# Altium PCB PCB2.PcbDoc
Units mil, origin at the board's own origin, x right, y up, seen from the top; angles counter-clockwise.
Board outline 5417.32 x 870.08 mil, 2 copper layers (Top Layer, Bottom Layer); 41 components, 29 nets, 145 pads, 30 vias.
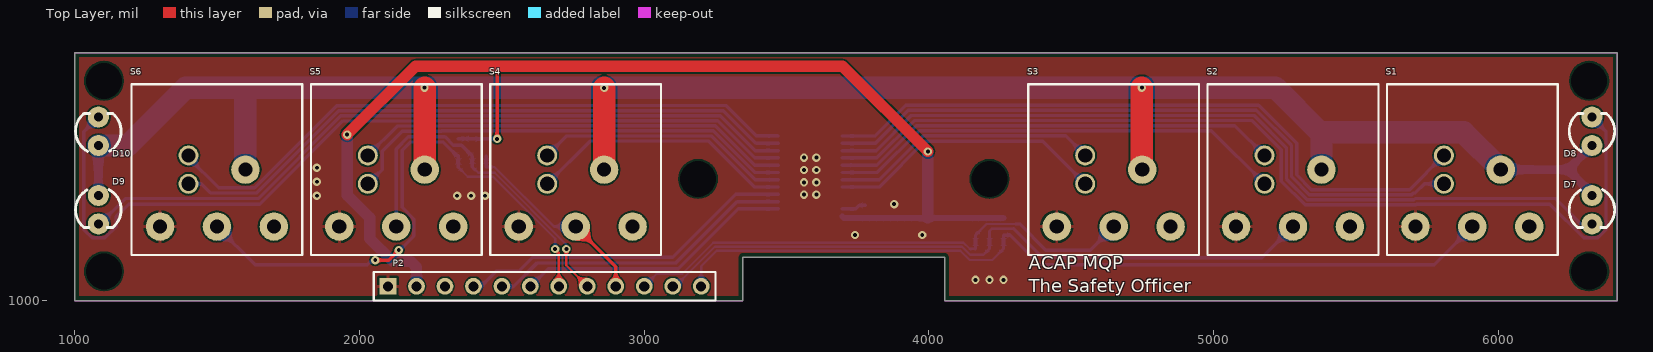
[diagram p0: Top Layer view]
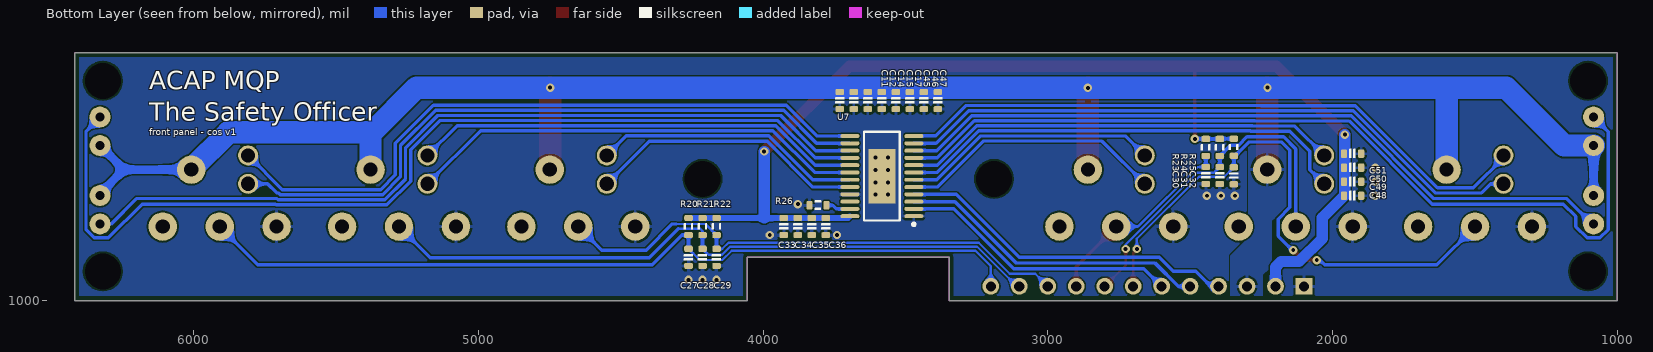
[diagram p1: Bottom Layer view, seen from below]
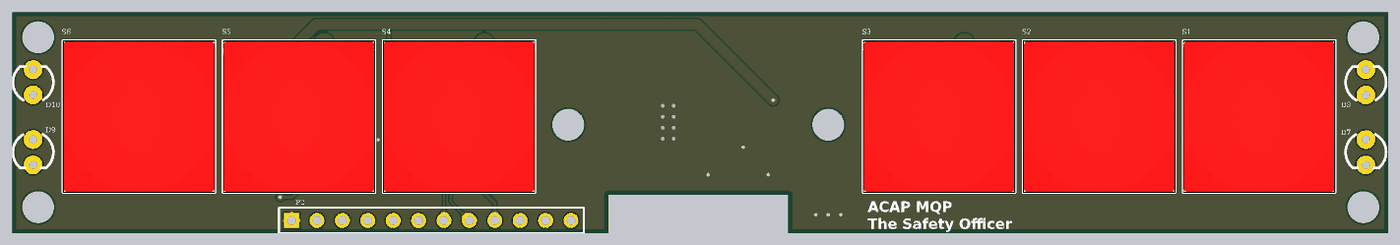
[diagram p2: 3D render of the assembled board from above, using the file's embedded part models]
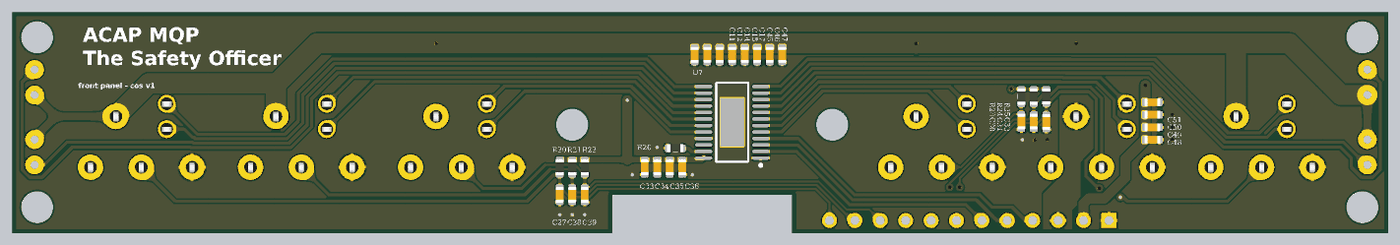
[diagram p3: 3D render of the assembled board from below, using the file's embedded part models]

## Layer stack, top to bottom
Top Solder: solder mask 0.4, Solder Resist, Dk 3.5
Top Layer: signal copper 1.4
Dielectric 1: dielectric 12.6, FR-4, Dk 4.8
Bottom Layer: signal copper 1.4
Bottom Solder: solder mask 0.4, Solder Resist, Dk 3.5

## Board outline
1000,1000 1000,1870.08 6417.32,1870.08 6417.32,1000 4055.12,1000 4055.12,1151.57 3346.46,1151.57 3346.46,1000

## Design rules (kind name [scope] priority, off if disabled: settings)
BoardOutlineClearance [InNetClass('All Nets')] p1: gap=15 ignorepadtopadclearanceinfootprint=FALSE
Clearance BoardEdge [All vs OnLayer('Keep-Out Layer')] p1: gap=15.75 ignorepadtopadclearanceinfootprint=FALSE
Clearance "Stitching GND" [IsStitchingVia and InNet('GND') vs (IsVia and (Not IsStitchingVia)) Or IsPad] p2 off: gap=5 ignorepadtopadclearanceinfootprint=FALSE except(0: Arc-Hole Track-Hole SMDPad-Hole THPad-Hole Via-Hole Fill-Hole Poly-Hole Region-Hole Text-Hole)
Clearance Clearance_outlinepolygon [inPolygon vs OnLayer('Keep-Out Layer')] p3 off: gap=15.75 ignorepadtopadclearanceinfootprint=FALSE except(0: Arc-Hole Track-Hole SMDPad-Hole THPad-Hole Via-Hole Fill-Hole Poly-Hole Region-Hole Text-Hole)
Clearance Clearance-polygonpolygon [InPolygon vs InPolygon] p4 off: gap=19.68 ignorepadtopadclearanceinfootprint=FALSE except(0: Arc-Hole Track-Hole SMDPad-Hole THPad-Hole Via-Hole Fill-Hole Poly-Hole Region-Hole Text-Hole)
Clearance Clearance_2 [All] p5: gap=6 ignorepadtopadclearanceinfootprint=FALSE except(0: Arc-Hole Track-Hole SMDPad-Hole THPad-Hole Via-Hole Fill-Hole Poly-Hole Region-Hole Text-Hole)
ComponentClearance [InComponentClass('no-clearance-check')] p1: gap=-39330.71 collisioncheckmode=3 verticalgap=-39330.71 showdistances=FALSE
ComponentClearance ComponentClearance_4 [All] p2: gap=10 collisioncheckmode=3 verticalgap=10 showdistances=FALSE
HoleSize [All] p1: absolutevalues=TRUE maxlimit=236.22 minlimit=13 maxpercent=80.000 minpercent=20.000
MinimumAnnularRing ignore [(HasFootprint('LMZ21701SIL') OR HasFootprint('m3 hole') OR HasFootprint('G3T-12AH'))] p1: minimumring=0
MinimumAnnularRing [All] p2: minimumring=7
MinimumSolderMaskSliver [All] p1: minsoldermaskwidth=2.99
NetAntennae [All] p1: netantennaetolerance=78.74
PolygonConnect PolygonConnect_heat [IsVia OR InPolygonClass('nothermalrelief') OR InPadClass('heatsink')] p1: connectstyle=Direct reliefconductorwidth=10 reliefentries=4 polygonreliefangle="90 Angle" airgapwidth=10
PolygonConnect [All] p2: connectstyle=Relief reliefconductorwidth=11.81 reliefentries=4 polygonreliefangle="90 Angle" airgapwidth=7.87
RoutingVias [All] p1: holewidth=28 width=50 viastyle="Through Hole" minholewidth=28 minwidth=50 maxholewidth=28 maxwidth=50 useviatemplates=TRUE viatemplateguid#1={89855FE1-761D-415D-8D08-2E9EAEC3F10C} viatemplatename#1=signal
SilkToSilkClearance [All] p1 off: silktosilkclearance=0
SilkToSolderMaskClearance SilkToSolderMaskClearance_1 [HasFootprint('PAD-JUMPER-2-NO_YES_SILK')] p1: minsilkscreentomaskgap=0 clearancetoexposedcopper=TRUE
SilkToSolderMaskClearance [IsPad] p2: minsilkscreentomaskgap=5.91 clearancetoexposedcopper=TRUE
SolderMaskExpansion [All] p1: expansion=3
Width [All] p1: maxlimit=999 minlimit=6 preferedwidth=11.81
24 further rules are at their usual default settings.

## Classes and differential pairs
pad class heatsink: U7-25
net class BUTTON[1..6]: BUTTON1 BUTTON2 BUTTON3 BUTTON4 BUTTON5 BUTTON6
component class frontpanel_interconnect: P2

## Components (designator, comment, footprint, x,y, rotation, side; value= is the part's Value field where it differs from the comment)
C11 "Cap_0603" CAP_0603 3730.49,1702.41 r90 bottom value=100nf
C12 "Cap_0603" CAP_0603 3681.26,1702.41 r90 bottom value=100nf
C14 "Cap_0603" CAP_0603 3632.05,1702.41 r90 bottom value=100nf
C15 "Cap_0603" CAP_0603 3582.83,1702.41 r90 bottom value=100nf
C17 "Cap_0603" CAP_0603 3533.62,1702.41 r90 bottom value=100nf
C27 "Cap_0603" CAP_0603 4261.81,1151.57 r90 bottom value=104
C28 "Cap_0603" CAP_0603 4212.6,1151.57 r90 bottom value=104
C29 "Cap_0603" CAP_0603 4163.39,1151.57 r90 bottom value=104
C30 "Cap_0603" CAP_0603 2444.88,1439.45 r90 bottom value=104
C31 "Cap_0603" CAP_0603 2395.67,1439.45 r90 bottom value=104
C32 "Cap_0603" CAP_0603 2346.46,1438.35 r90 bottom value=104
C33 "Cap_0603" CAP_0603 3927.17,1259.84 r90 bottom value=100nf
C34 "Cap_0603" CAP_0603 3877.95,1259.84 r90 bottom value=100nf
C35 "Cap_0603" CAP_0603 3828.74,1259.84 r90 bottom value=100nf
C36 "Cap_0603" CAP_0603 3779.53,1259.84 r90 bottom value=100nf
C45 "Cap_0603" CAP_0603 3484.41,1702.41 r90 bottom value=100nf
C46 "Cap_0603" CAP_0603 3435.2,1702.41 r90 bottom value=100nf
C47 "Cap_0603" CAP_0603 3385.98,1702.41 r90 bottom value=100nf
C48 "Cap_0603" CAP_0603 1929.13,1368.11 r0 bottom value=100nf
C49 "Cap_0603" CAP_0603 1929.13,1417.32 r0 bottom value=100nf
C50 "Cap_0603" CAP_0603 1929.13,1466.54 r0 bottom value=100nf
C51 "Cap_0603" CAP_0603 1929.13,1515.75 r0 bottom value=100nf
D7 "" LED3MM 6328.74,1318.9 r270 top
D8 "" LED3MM 6328.74,1594.49 r90 top
D9 "" LED3MM 1082.68,1318.9 r270 top
D10 "" LED3MM 1082.68,1594.49 r90 top
P2 "Header 12" HDR1X12 2100,1050 r0 top
R20 "Res_0603" RES_0603 4261.81,1259.84 r90 bottom value=20k
R21 "Res_0603" RES_0603 4212.6,1259.84 r90 bottom value=20k
R22 "Res_0603" RES_0603 4163.39,1259.84 r90 bottom value=20k
R23 "Res_0603" RES_0603 2444.88,1537.87 r90 bottom value=20k
R24 "Res_0603" RES_0603 2395.67,1537.87 r90 bottom value=20k
R25 "Res_0603" RES_0603 2346.46,1538.35 r90 bottom value=20k
R26 "Res_0603" RES_0603 3807.09,1334.65 r0 bottom value=750+
S1 "UB2 Switch" "EXTRON CLICKY" 5908.66,1459.84 r270 top
S2 "UB2 Switch" "EXTRON CLICKY" 5278.74,1459.84 r270 top
S3 "UB2 Switch" "EXTRON CLICKY" 4648.82,1459.84 r270 top
S4 "UB2 Switch" "EXTRON CLICKY" 2759.06,1459.84 r270 top
S5 "UB2 Switch" "EXTRON CLICKY" 2129.13,1459.84 r270 top
S6 "UB2 Switch" "EXTRON CLICKY" 1499.21,1459.84 r270 top
U7 "TLC5926QPWPRQ1" TI-PWP24-4420X1950TP_N 3582.68,1437.01 r0 bottom

## Footprints (in the part's own frame and the unit in brackets; to place one, negate y for a bottom-side part, rotate by r counter-clockwise, add the part's x,y. Pads: shape width x height; smd on the part's side, far side on the other; paste and mask are expansions set on the pad)
CAP_0603 [mil]
  rrect50% 22x30 smd: 1(-30,0) 2(30,0)
  silkscreen extent -10,-15 10,15, body extent -31,-16 31,16, height 31
"EXTRON CLICKY" [mil]
  round 100 hole 50: 1(200,-200) 2(200,0) 3(200,200) 4(0,100)
  round 70 hole 50: 5(-50,-100) 6(50,-100)
  silkscreen extent -300,-300 300,300, body extent -299,-300 301,300, height 732
HDR1X12 [mm] "Connector; Header; 12 Position"
  rect 1.5x1.5 hole 0.9: 1(0,0)
  round 1.5 hole 0.9: 2(2.54,0) 3(5.08,0) 4(7.62,0) 5(10.16,0) 6(12.7,0) 7(15.24,0) 8(17.78,0) 9(20.32,0) 10(22.86,0) 11(25.4,0) 12(27.94,0)
  silkscreen extent -1.27,-1.27 29.21,1.27
LED3MM [mil]
  round 74 hole 32: A(-50,0) K(50,0)
  silkscreen extent -71,-80 62,80
RES_0603 [mil]
  rrect50% 22x30 smd: 1(-30,0) 2(30,0)
  silkscreen extent -10,-16 10,16, body extent -31,-16 31,16, height 18
TI-PWP24-4420X1950TP_N [mm] "SOP, 24-Leads, Body 7.8x4.4mm, Pitch 0.65mm, Thermal Pad 4.42x1.95mm, IPC Medium Density"
  oval 1.7x0.35 smd: 1(-2.85,3.575) 2(-2.85,2.925) 3(-2.85,2.275) 4(-2.85,1.625) 5(-2.85,0.975) 6(-2.85,0.325) 7(-2.85,-0.325) 8(-2.85,-0.975) 9(-2.85,-1.625) 10(-2.85,-2.275) 11(-2.85,-2.925) 12(-2.85,-3.575) 13(2.85,-3.575) 14(2.85,-2.925) 15(2.85,-2.275) 16(2.85,-1.625) 17(2.85,-0.975) 18(2.85,-0.325) 19(2.85,0.325) 20(2.85,0.975) 21(2.85,1.625) 22(2.85,2.275) 23(2.85,2.925) 24(2.85,3.575)
  rect 2.4x4.87 smd: 25(0,0)
  silkscreen extent -2.97,-3.95 1.6,4.42, body extent -2.25,-3.95 2.25,3.95, height 1.2

## Part data
C11 C12 C14 C15 C17 C27 C28 C29 C30 C31 C32 C33 C34 C35 C36 C45 C46 C47 C48 C49 C50 C51: "Capacitor"
D7 D8 D9 D10: library part LED3MM, PROD_ID=DIO-08794
P2: "Header, 12-Pin", LatestRevisionDate=17-Jul-2002, LatestRevisionNote="Re-released for DXP Platform.", Publisher="Altium Limited"
R20 R21 R22 R23 R24 R25 R26: "Resistor"
S1 S2 S3 S4 S5 S6: library part "EXTRON CLICKY"
U7: "Automotive Catalog 16-Bit Constant-Current LED Sink Driver, 3 to 5.5 V, -40 to 125 degC, 24-pin SOP (PWP24), Green (RoHS & no Sb/Br)", Manufacturer="Texas Instruments", Supplier Part Number 1=296-24948-2-ND, Code_JEDEC=MO-153, ComponentLink1Description="Manufacturer URL", ComponentLink1URL=http://www.ti.com/, ComponentLink2Description=Datasheet, ComponentLink2URL=http://www.ti.com/general/docs/lit/getliterature.tsp?genericPartNumber=TLC5926-Q1&fileType=pdf, ComponentLink3Description="Package Specification", ComponentLink3URL=http://www.ti.com/lit/ds/symlink/tps65101.pdf, DatasheetVersion=SLVS973, Eco-Plan="Green (RoHS & no Sb/Br)", Iout(Max)(A)=0.12, Mounting Technology="Surface Mount", PackageDescription="24-Lead, Plastic Small Outline, Body Size 4.4 x 7.8 mm, Pitch 0.65 mm", PackageReference=PWP24-4420X1950TP, PackageVersion=4073225-5/I, PartNumber=TLC5926QPWPRQ1, SubFamily="LED Driver", Supplier 1=Digi-Key, Supplier 2=Digi-Key, Supplier 3=Digi-Key, Supplier 4=Newark, Supplier 5=Mouser, Supplier Part Number 2=296-24948-1-ND, Supplier Part Number 3=296-24948-6-ND, Supplier Part Number 4=24R9990, Supplier Part Number 5=595-TLC5926QPWPRQ1, Vin(Max)(V)=5.5, Vin(Min)(V)=3

## Free pads (board coordinates)
  round 0 hole 125.98 unplated: 0(1102.36,1102.36) 0(1102.36,1771.65) 0(3188.98,1427.17) 0(4212.6,1427.17) 0(6318.9,1102.36) 0(6318.9,1771.65)

## Via types
v1: diameter 29.53, hole 13.78, Top Layer to Bottom Layer, tented both sides, 30 vias

## Nets (pads, with @x,y where several pads share a name; then routed paths per layer and width w, separated by ;. In a path a pad name is that pad's centre, name@x,y a point inside that pad or via, vN(x,y) a via of type N, cw(c..) or ccw(c..) an arc to the next point about the centre after c; other vN are vias at no path point)
BUTTON1: C32.2 P2.7 R25.1 S6.2 | length 1998.8
  Top Layer w7.87: v1(2687.01,1181.1) 2687.01,1179.13 2700,1166.13 P2.7
  Top Layer w11.81: v1(2055.12,1141.73) 2102.36,1141.73 v1(2137.79,1177.16)
  Bottom Layer w7.87: C32.2 2380.17,1434.64 2469.02,1434.64 2687.01,1216.65 v1(2687.01,1181.1)
  Bottom Layer w11.81: S6.2 1633.07,1125.98 2027.56,1125.98 2043.31,1141.73 v1(2055.12,1141.73) ; v1(2137.79,1177.16) 2137.79,1173.23 2191.04,1226.48 2191.04,1285.48 2149.61,1326.92 2149.61,1527.56 2179.13,1557.09 2292.91,1557.09 2341.65,1508.35 R25.1 C32.2
BUTTON2: C31.2 P2.8 R24.1 S5.2 | length 1243.8
  Top Layer w7.87: v1(2726.37,1181.1) 2726.37,1123.63 P2.8
  Bottom Layer w7.87: C31.2 2416.61,1448.51 2474.77,1448.51 2726.37,1196.91 v1(2726.37,1181.1)
  Bottom Layer w11.81: S5.2 2129.13,1532.28 2171.76,1574.9 2300.29,1574.9 2329.75,1545.44 2358.1,1545.44 R24.1 C31.2
BUTTON3: C30.2 P2.9 R23.1 S4.2 | length 707.6
  Top Layer w11.81: S4.2 2900,1118.9 P2.9
  Bottom Layer w7.87: C30.2 2473.45,1469.45 2683.06,1259.84 S4.2
  Bottom Layer w11.81: C30.2 R23.1
BUTTON4: C29.2 P2.10 R22.1 S3.2 | length 1857.7
  Bottom Layer w7.87: P2.10 3043.92,1093.92 3133.29,1093.92 3242.31,1202.94 4121.73,1202.94 4143.1,1181.57 C29.2 ; R22.1 4202.45,1268.91 4318.9,1268.91
  Bottom Layer w11.81: C29.2 R22.1 ; 4318.9,1268.91 4410.64,1177.17 4566.14,1177.17 S3.2
BUTTON5: C28.2 P2.11 R21.1 S2.2 | length 2409.8
  Bottom Layer w7.87: P2.11 3109.05,1050 3248.13,1189.07 4115.98,1189.07 4144.42,1160.64 4191.66,1160.64 C28.2 ; R21.1 4212.6,1244.09 4220.47,1251.97 4298.34,1251.97
  Bottom Layer w11.81: C28.2 R21.1 ; 4298.34,1251.97 4399.66,1150.65 5169.55,1150.65 S2.2
BUTTON6: C27.2 P2.12 R20.1 S1.2 | length 2978.5
  Bottom Layer w7.87: P2.12 3200,1121.26 3253.94,1175.2 4110.24,1175.2 4142.92,1142.51 4222.75,1142.51 C27.2
  Bottom Layer w11.81: C27.2 R20.1 4285.91,1229.84 4389.53,1126.21 5775.03,1126.21 S1.2
GND: C11.1 C12.1 C14.1 C15.1 C17.1 C27.1 C28.1 C29.1 C30.1 C31.1 C32.1 C33.1 C34.1 C35.1 C36.1 C45.1 C46.1 C47.1 C48.1 C49.1 C50.1 C51.1 P2.1 R26.2 S1.1 S2.1 S3.1 S4.1 S5.1 S6.1 U7.1 U7.21 U7.25
  other v1: 4163.39,1072.83 4212.6,1072.83 4261.81,1072.83 3740.16,1230.32 3976.38,1230.32 3877.95,1338.58 1850.39,1368.11 2342.52,1368.11 2391.73,1368.11 2440.94,1368.11 3561.02,1372.05 3604.33,1372.05 3561.02,1415.35 3604.33,1415.35 1850.39,1417.32 3561.02,1458.66 3604.33,1458.66 1850.39,1466.54 3561.02,1501.97 3604.33,1501.97
LED1: S1.6 U7.14 | length 2364.5
  Bottom Layer w11.81: U7.14 3812.29,1552.17 3927.92,1667.8 5150.3,1667.8 5273.53,1544.57 5273.53,1434.33 5335.9,1371.95 5695.96,1371.95 5701.96,1377.95 5708.66,1377.95 5740.55,1409.84 S1.6
LED2: S1.5 U7.13 | length 2395.3
  Bottom Layer w11.81: U7.13 3810.04,1577.76 3917.89,1685.61 5157.68,1685.61 5291.34,1551.94 5291.34,1441.71 5343.28,1389.76 5688.58,1389.76 S1.5
LED3: S2.6 U7.18 | length 1622
  Bottom Layer w11.81: U7.18 3818.75,1449.8 3965.5,1596.55 4992.03,1596.55 S2.6
LED4: S2.5 U7.17 | length 1584.7
  Bottom Layer w11.81: U7.17 3816.38,1475.39 3955.35,1614.36 5074.22,1614.36 S2.5
LED5: S3.6 U7.20 | length 982.2
  Bottom Layer w11.81: U7.20 3825.39,1398.62 3985.82,1559.06 4399.61,1559.06 S3.6
LED6: S3.5 U7.19 | length 946.5
  Bottom Layer w11.81: U7.19 3825.79,1424.21 3980.32,1578.74 4479.92,1578.74 S3.5
LED7: S4.6 U7.5 | length 940.7
  Bottom Layer w11.81: S4.6 2809.48,1560.27 3227.13,1560.27 3388.78,1398.62 U7.5
LED8: S4.5 U7.6 | length 903.4
  Bottom Layer w11.81: S4.5 2727.29,1578.08 3235.32,1578.08 3389.18,1424.21 U7.6
LED9: S5.6 U7.7 | length 1616.5
  Bottom Layer w11.81: S5.6 2079.33,1460.04 2079.33,1524.21 2150.22,1595.1 2287.26,1595.1 2288.05,1595.89 3242.69,1595.89 3388.78,1449.8 U7.7
LED10: S5.5 U7.8 | length 1541.6
  Bottom Layer w11.81: S5.5 2132.2,1612.91 2279.88,1612.91 2280.67,1613.7 3250.07,1613.7 3388.38,1475.39 U7.8
LED11: S6.6 U7.11 | length 2251.9
  Bottom Layer w11.81: S6.6 1444.49,1409.84 1476.38,1377.95 1638.6,1377.95 1926.99,1666.35 2257.75,1666.35 2258.54,1667.13 3277.5,1667.13 3392.47,1552.17 U7.11
LED12: S6.5 U7.12 | length 2287.1
  Bottom Layer w11.81: S6.5 1399.21,1502.36 1505.81,1395.76 1631.22,1395.76 1919.62,1684.16 2250.37,1684.16 2251.16,1684.94 3287.53,1684.94 3393.72,1578.76 3469.47,1578.76 U7.12
led_driver_le: P2.4 U7.4 | length 1204.3
  Bottom Layer w11.81: P2.4 2427.95,1050 2480.32,1102.36 2559.06,1102.36 2608.27,1151.57 3100.39,1151.57 3321.85,1373.03 U7.4
mosi: P2.6 U7.2 | length 983.1
  Bottom Layer w11.81: P2.6 2662.2,1112.2 3120.08,1112.2 3329.72,1321.85 U7.2
NetD7_K: D7.K U7.15 | length 2910.8
  Bottom Layer w11.81: U7.15 3814.54,1526.57 3937.95,1649.98 5142.92,1649.98 5255.72,1537.19 5255.72,1426.95 5328.53,1354.14 5703.34,1354.14 5707.46,1358.27 6200.79,1358.27 6290.16,1268.9 D7.K
NetD8_K: D8.K U7.16 | length 3402.5
  Bottom Layer w11.81: U7.16 3816.78,1500.98 3947.97,1632.17 5135.54,1632.17 5237.91,1529.81 5237.91,1419.57 5321.15,1336.33 5710.72,1336.33 5712.97,1338.58 6181.1,1338.58 6299.69,1219.99 6349,1219.99 6377.95,1248.95 6377.95,1594.49 6328.74,1643.7 D8.K
NetD9_K: D9.K U7.10 | length 2596.2
  Bottom Layer w11.81: D9.K 1087.8,1268.9 1177.17,1358.27 1644.1,1358.27 1934.37,1648.54 2265.13,1648.54 2265.92,1649.32 3267.48,1649.32 3390.22,1526.57 U7.10
NetD10_K: D10.K U7.9 | length 3112.9
  Bottom Layer w11.81: D10.K 1031.4,1593.21 1031.4,1249.35 1060.76,1219.99 1105.82,1219.99 1145.67,1259.84 1145.67,1295.28 1188.98,1338.58 1649.61,1338.58 1941.75,1630.72 2272.51,1630.72 2273.29,1631.51 3257.45,1631.51 3387.98,1500.98 U7.9
NetR26_1: R26.1 U7.23 | length 87.5
  Bottom Layer w11.81: U7.23 3743.11,1321.85 3755.91,1334.65 R26.1
sck: P2.5 U7.3 | length 1093.7
  Bottom Layer w11.81: P2.5 2541.4,1050 2623.29,1131.89 3110.24,1131.89 3325.79,1347.44 U7.3
VCC_3.3: C33.2 C34.2 C35.2 C36.2 C48.2 C49.2 C50.2 C51.2 P2.2 R20.2 R21.2 R22.2 R23.2 R24.2 R25.2 U7.24 | length 4127.5
  Top Layer w11.81: v1(2483.31,1567.87) 2483.31,1821.89
  Top Layer w39.37: v1(1956.69,1582.68) 2196.85,1822.83 3696.85,1822.83 v1(3996.06,1523.62)
  Bottom Layer w11.81: R25.2 2395.2,1568.35 R24.2 R23.2 v1(2483.31,1567.87)
  Bottom Layer w19.68: U7.24 3701.3,1289.84 C36.2 C35.2 C34.2 C33.2 3996.06,1289.84 R22.2 R21.2 R20.2
  Bottom Layer w39.37: v1(1956.69,1582.68) 1956.69,1370.08 2035.64,1291.13 2035.64,1218.42 2117.34,1136.71 2180.22,1136.71 2200,1116.93 P2.2 ; 3996.06,1289.84 v1(3996.06,1523.62)
VCC_5: C11.2 C12.2 C14.2 C15.2 C17.2 C45.2 C46.2 C47.2 D7.A D8.A D9.A D10.A P2.3 S1.4 S2.4 S3.4 S4.4 S5.4 S6.4 | length 7066.9
  Top Layer w78.74: v1(2228.35,1748.03) 2228.35,1460.63 S5.4 ; S4.4 v1(2859.06,1747.24) ; v1(4748.03,1748.03) 4748.03,1460.63 S3.4
  Bottom Layer w29.53: D9.A D10.A ; S1.4 6244.09,1459.84 ; D7.A 6328.74,1375.2 6244.09,1459.84 ; D8.A 6244.09,1459.84
  Bottom Layer w78.74: D10.A 1186.22,1544.49 1389.76,1748.03 1598.43,1748.03 ; S6.4 1599.21,1747.24 1598.43,1748.03 ; v1(2859.06,1747.24) v1@2858.27,1748.03 ; S2.4 5378.74,1586.23 ; S1.4 5877.95,1590.55 5374.42,1590.55 5216.94,1748.03 v1(4748.03,1748.03) 3533.62,1748.03 v1@2858.27,1748.03 ; 1598.43,1748.03 v1(2228.35,1748.03) v1@2858.27,1748.03
pads on no net: S1.3 S2.3 S3.3 S4.3 S5.3 S6.3 U7.22

## Polygon pours and split planes (outlines as drawn)
GND on Top Layer "GND_L01_P004" (solid, pour order 4): 1000,1000 1000,1870.08 6417.32,1870.08 6417.32,1000 4055.12,1000 4055.12,1151.57 3346.46,1151.57 3346.46,1000
GND on Bottom Layer "GND_L02_P005" (solid, pour order 5): 1000,1000 1000,1870.08 6417.32,1870.08 6417.32,1000 4055.12,1000 4055.12,1151.57 3346.46,1151.57 3346.46,1000
VCC_5 on Bottom Layer "VCC_5_L02_P002" (solid, pour order 2): 2244.09,1007.87 2354.33,1007.87 2358.27,1011.81 2358.27,1157.48 2295.28,1220.47 2295.28,1539.37 2299.21,1543.31 2287.4,1555.12 2153.54,1555.12 2153.54,1338.58 2212.6,1279.53 2212.6,1122.05 2244.09,1090.55

## Keep-outs
Keep-Out Layer:
  lines w0.39: 1000,1000 2354.33,1000 3346.46,1000 3346.46,1151.57 4055.12,1151.57 4055.12,1000 5062.99,1000 6417.32,1000 6417.32,1870.08 1000,1870.08 1000,1000

## Silkscreen, mask and mechanical layers (free items; w line width, h text height)
Top Overlay:
  text "ACAP MQP / The Safety Officer" at 4350.39,1013.78 h80
Bottom Overlay:
  text "ACAP MQP / The Safety Officer" at 6156.5,1611.22 h110.24
  text "front panel - cos v1" at 6156.5,1571.85 h39.37
Mechanical 5:
  lines w7.87: 3350,1000 3350,1150 4050,1150 4050,1000 ; 3150,1000 3150,2100 4250,2100 4250,1000 3150,1000

## Dimensions
1000,1000 to 2100,1050 on Mechanical 5
1000,1000 to 3150,1000 on Mechanical 5